# EAGLE board Domino Single USB No Teardrop (EAGLE 6.5.0)
DATE: 20140723; DRAWN: M.STEMPIN; REV: A
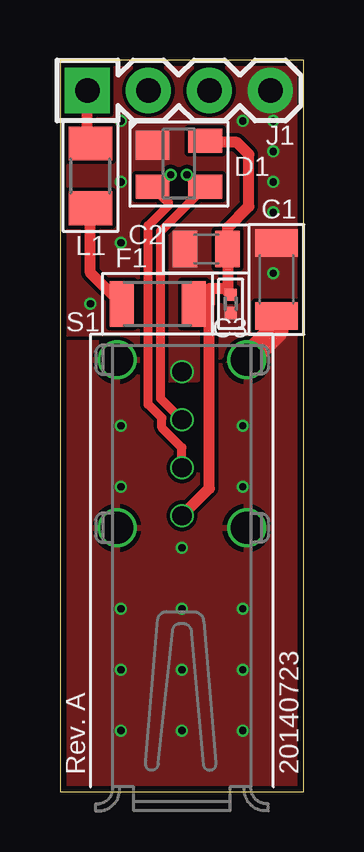
[diagram p0: board, top side]
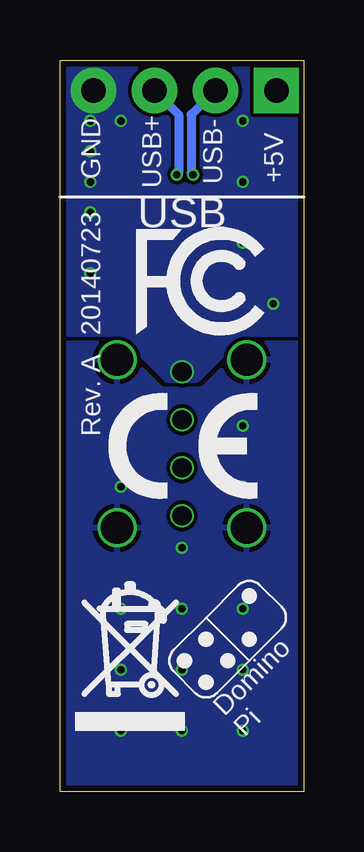
[diagram p1: board, bottom side, seen from below]

Size 10.16 x 30.48 mm. Coordinates in mm from the lower left corner, seen from the top.
Outline: 0,0 10.16,0 10.16,30.48 0,30.48 0,0
Copper layers (1*16): Top 0.043mm / dielectric 1mm / Bottom 0.043mm
Design rules "Domino": minimum track width 0.1mm, minimum drill 0.3mm, track to track 6mil, track to pad 6mil, pad to pad 6mil, via to via 6mil, smd to smd 0mil, copper to edge 0.25mm, drill to drill 0.35mm, minimum pad ring 0.085mm, minimum via ring 0.1mm, stop-mask expansion 0mil, vias tented up to drill 0.45mm, thermal gap 0.2mm
Net classes: 1 USB: width 0.368 mm, clearance 0.152 mm to class 0, clearance 0.152 mm; 2 PoE: width 0.457 mm, clearance 0.254 mm to class 0, clearance 0.254 mm to class 1, clearance 0.254 mm

## Footprints (pad centres in the part's own frame; a part is rotated, then mirrored left to right if it is on the bottom)
C1206 = smd 1.143 x 1.778: 1 -1.524,0; 2 1.524,0
C0805 = smd 1.016 x 1.524: 1 -0.889,0; 2 0.889,0
C0402 = smd 0.508 x 0.508: 1 -0.381,0; 2 0.381,0
SOT143B = smd 1.2 x 1.4: 1 -0.76,-1.1 | smd 1 x 1.4: 2 0.96,-1.1; 3 0.96,1.1; 4 -0.96,1.1
PTC1206 = smd 1 x 1.9: 1 -1.5,0; 2 1.5,0
MH4-1-0.1 = drill 1.016 pad 1.88 square: 1 0,0 | drill 1.016 pad 1.88: 2 2.54,0; 3 5.08,0; 4 7.62,0
FB1206 = smd 1.4 x 1.8: 1 -1.35,0; 2 1.35,0
USB_AF-020 = drill 0.8: 1 0,2.6; 2 0,4.6; 3 0,6.6; 4 0,8.6 | drill 1.35: G$1 -2.7,2.1; G$2 2.7,2.1; G$3 2.7,9.1; G$4 -2.7,9.1

## Placement (x,y rotation side)
C1  1n  [C1206]  9.02,21.34 90 top
C2  10u  [C0805]  6.1,22.61 180 top
C3  100n  [C0402]  7.11,20.32 270 top
CC-BY-SA1  CC-BY-SA_LOGO  [CC-BY-SA_LOGO]  -5.08,-50.8 0 top  (outside the outline)
D1  YSSR05  [SOT143B]  4.95,26.16 270 top
DRILEGEND  [DRILEGEND]  81.53,61.21 0 top  (outside the outline)
F1  0ZCA0050FF2G  [PTC1206]  4.06,20.32 0 top
J1  MH4-1  [MH4-1-0.1]  1.14,29.21 0 top
L1  BLM31PG601SN1L  [FB1206]  1.27,25.65 270 top
S1  USB_AF-020  [USB_AF-020]  5.08,8.89 0 top
U$3  [A5L-LOC]  -55.88,-62.23 0 top  (outside the outline)
U$4  [DOMINO_LOGO_SMALL]  3.17,6.35 0 bottom
U$5  [CE_LOGO_SMALL]  8.13,12.19 0 bottom
U$6  [FCC_LOGO_SMALL]  6.99,19.05 0 bottom
U$8  [RECYCLE_BIN_LOGO]  9.53,2.54 0 bottom

## Library data of the parts
C1 = Domino; PARTNO: C1206_1n_X7R_10%_CER_500V; SIZE: 1206; TC: X7R; TOL: ±10%; TYPE: CER; VOLT: 500V
C2 = Domino; PARTNO: C0805_10u_X5R_10%_CER_16V; SIZE: 0805; TC: X5R; TOL: ±10%; TYPE: CER; VOLT: 16V
C3 = Domino; PARTNO: C0402_100n_X7R_10%_CER_50V; SIZE: 0402; TC: X7R; TOL: ±10%; TYPE: CER; VOLT: 50V
CC-BY-SA1 = Domino; BOM: EXCLUDE
D1 = Domino; PARTNO: YSSR05; RATE: 300W; VOLT: 5V
DRILEGEND = drilegend
F1 = Domino; PARTNO: 0ZCG0110FF2C; RATE: 0.5A; VOLT: 8V
J1 = Domino; PARTNO: MH4-1-0.1
L1 = Domino; OPT: 600R/1A5; PARTNO: BLM31PG601SN1L; SIZE: 1206
S1 = Domino; PARTNO: USB_AF-020
U$3-U$6 U$8 = Domino

## Nets
+VUSB: J1.1 L1.1
D_N [USB]: D1.2 J1.2 S1.2
D_P [USB]: D1.3 J1.3 S1.3
GND: C1.2 C2.2 C3.2 D1.1 J1.4 S1.4
PE: C1.1 S1.G$1 S1.G$2 S1.G$3 S1.G$4
VBUS: C2.1 C3.1 D1.4 F1.2 S1.1
VPROT: F1.1 L1.2

## Tracks (layer width: path | path; a pad name or v marks a point on that pad's centre or on a via)
+VUSB
  Top 0.457: L1.1 1.14,27.13 J1.1
D_N  (via drill 0.3 pad 0.03)
  Top 0.368: S1.2 5.08,14.33 4.24,15.16 4.24,15.57 3.68,16.14 3.68,23.58 4.51,24.42 4.51,24.54 D1.2 4.11,25.2 v4.62,25.7
  Bottom 0.368: J1.2 4.69,28.2 4.69,25.78 v4.62,25.7
D_P  (via drill 0.3 pad 0.03)
  Top 0.368: S1.3 4.2,16.37 4.2,23.35 D1.3 5.79,25.2 v5.29,25.7
  Bottom 0.368: J1.3 5.21,28.2 5.21,25.78 v5.29,25.7
GND  (via drill 0.3 pad 0.03)
  other vias: 2.54,27.94 7.62,27.94 8.89,27.94 2.54,25.4 8.89,26.67 8.89,25.4 8.89,24.13 2.54,22.86 8.89,21.59 1.27,20.32
  pour Top (no thermals): 0,30.48 10.16,30.48 10.16,19.05 7.62,19.05 5.71,17.14 4.45,17.14 2.54,19.05 0,19.05
  pour Bottom (no thermals): 0,30.48 10.16,30.48 10.16,19.05 7.62,19.05 5.71,17.14 4.45,17.14 2.54,19.05 0,19.05
PE  (via drill 0.3 pad 0.03)
  Top 1.016: C1.1 9.02,19.23 S1.G$3
  other vias: 2.54,15.24 7.62,15.24 7.62,12.7 2.54,12.7 5.08,10.16 7.62,7.62 5.08,7.62 2.54,7.62 2.54,5.08 5.08,5.08 7.62,5.08 7.62,2.54 5.08,2.54 2.54,2.54
  pour Bottom (rank 2): 0,0 10.16,0 10.16,19.05 7.62,19.05 5.71,17.14 4.45,17.14 2.54,19.05 0,19.05
  pour Top (rank 2): 0,0 10.16,0 10.16,19.05 7.62,19.05 5.71,17.14 4.45,17.14 2.54,19.05 0,19.05
VBUS
  Top 0.457: S1.1 6.22,12.63 6.22,20.32 | 6.22,20.32 F1.2 | 6.99,20.95 C2.1 6.99,23.5 7.87,24.38 7.87,26.54 7.37,27.05 6.12,27.05 D1.4 | 6.99,20.95 6.22,20.95 6.22,20.32 | C3.1 6.99,20.83 6.99,20.95
VPROT
  Top 0.457: F1.1 1.27,21.61 L1.2

## Text on the board
bPlace: USB- | USB+ | GND | +5V | USB
tNames: Rev. A
bNames: Rev. A
Document: DRILL CHART: TOP TO BOTTOM | LINE WIDTH IMPEDANCE CHART FOR REFERENCE | Class | USB | Type | Diff Coated Coplanar Waveguide With Ground 1B | Layer | Impedance | Trace Width | Trace Separation | Ground Separation | TOP, / BOTTOM | 90 Ohms | 14.5 mils | 6 mils | 6 mils | STACK-UP FOR REFERENCE | LAYER 1 L1 TOP | 18 UM CU + 12.5 UM PLATING (30.5 UM) | 1.061 MM+/-10% | CORE | 1.0 MM CORE FR-4 LG 135 / INCLUDING COPPER | LAYER 4 L16 BOTTOM | 18 UM CU + 12.5 UM PLATING (30.5 UM) | NOTES: | 1. PRINTED CIRCUIT BOARD MADE FROM NEMA GRADE FR-4 TG 135 EPOXY / LAMINATE WITH 18 UM COPPER PLATING AND 1 MM THICKNESS. | 2. ALL DIMENSIONS ARE GIVEN IN MILLIMETERS EXCEPT TRACE WIDTH/SPACE. | 3. CIRCUIT PATHS ARE FOR REFERENCE ONLY. | 4. HOLE SIZES SHOWN ARE FINISHED DIAMETERS AFTER PLATING. | 5. BOARD PLATED USING REFLOW OR SIMILAR METHOD. | 6. BOARD TO HAVE WHITE SOLDER MASK ON PLATED SURFACES USING WET / FILM SR100 OR SR1010 EPOXY. / EQUIVALENT WET OR DRY FILM MAY BE USED. | 7. SILKSCREEN BOARD USING BLACK INK. DISTORTION OF SILKSCREEN / IS ACCEPTABLE OVER TRACES. EPOXY INK ON PLATED LANDS IS NOT / ACCEPTABLE | 8. THE FOLLOWING INFORMATION APPLIES TO THIS BOARD: | * 2 COPPER LAYERS | * 1 MM BOARD THICKNESS | * REQUIRES TOP AND BOTTOM SIDE SILKSCREENS | © 2014, Michel Stempin. / All rights reserved. | Licensed under a Creative Commons / Attribution-Share-Alike Unported License. / See creativecommons.org/licenses/by-sa/4.0/ | Reference designs are provided "AS IS" and "WITH ALL FAULTS". / Michel Stempin disclaims all other warranties express or implied, / regarding this product, including but not limited to, any implied warranties of / merchantibility or fitness for any particular application. | Domino / Core | Domino / Pi | Domino / Qi | Michel Stempin may make changes to specifications and product descriptions / at any time, without notice. | Rev.
DrillLegend: LAYER-STACK
DrillLegend_01-16: 01-16
Pinout: +5V | USB- | USB+ | GND | Pinout (.PIN)
Component_side: Component Side (.CMP)
Solder_side: Solder side (.SOL)
Silk_screen_CMP: Silk screen CMP (.PLC)
Silk_screen_SOL: Silk screen SOL (.PLS)
Solder_stop_mask_CMP: Solder stop mask CMP (.STC)
Solder_stop_mask_SOL: Solder stop mask SOL (.STS)
Cream_frame_CMP: Cream frame CMP (.CRC)
Cream_frame_SOL: Cream frame SOL (.CRS)
Drill_data: Drill data (.DRD)
Component_Assembly_CMP: Component Assembly CMP (.ASC)
Component_Assembly_SOL: Component Assembly SOL (.ASS)
Outline: Outline (.OLN)